# Altium PCB HU_SUPPORT_BOARD.PcbDoc (part 1 of 2)
Units mm, origin at the board's own origin, x right, y up, seen from the top; angles counter-clockwise.
Board outline 160 x 100 mm, 4 copper layers (Top Layer, Layer 1, Layer 2, Bottom Layer), stack 1.586 mm thick; 158 components, 113 nets, 591 pads, 28 vias.
Unrouted connection lines stored in the file: 303.
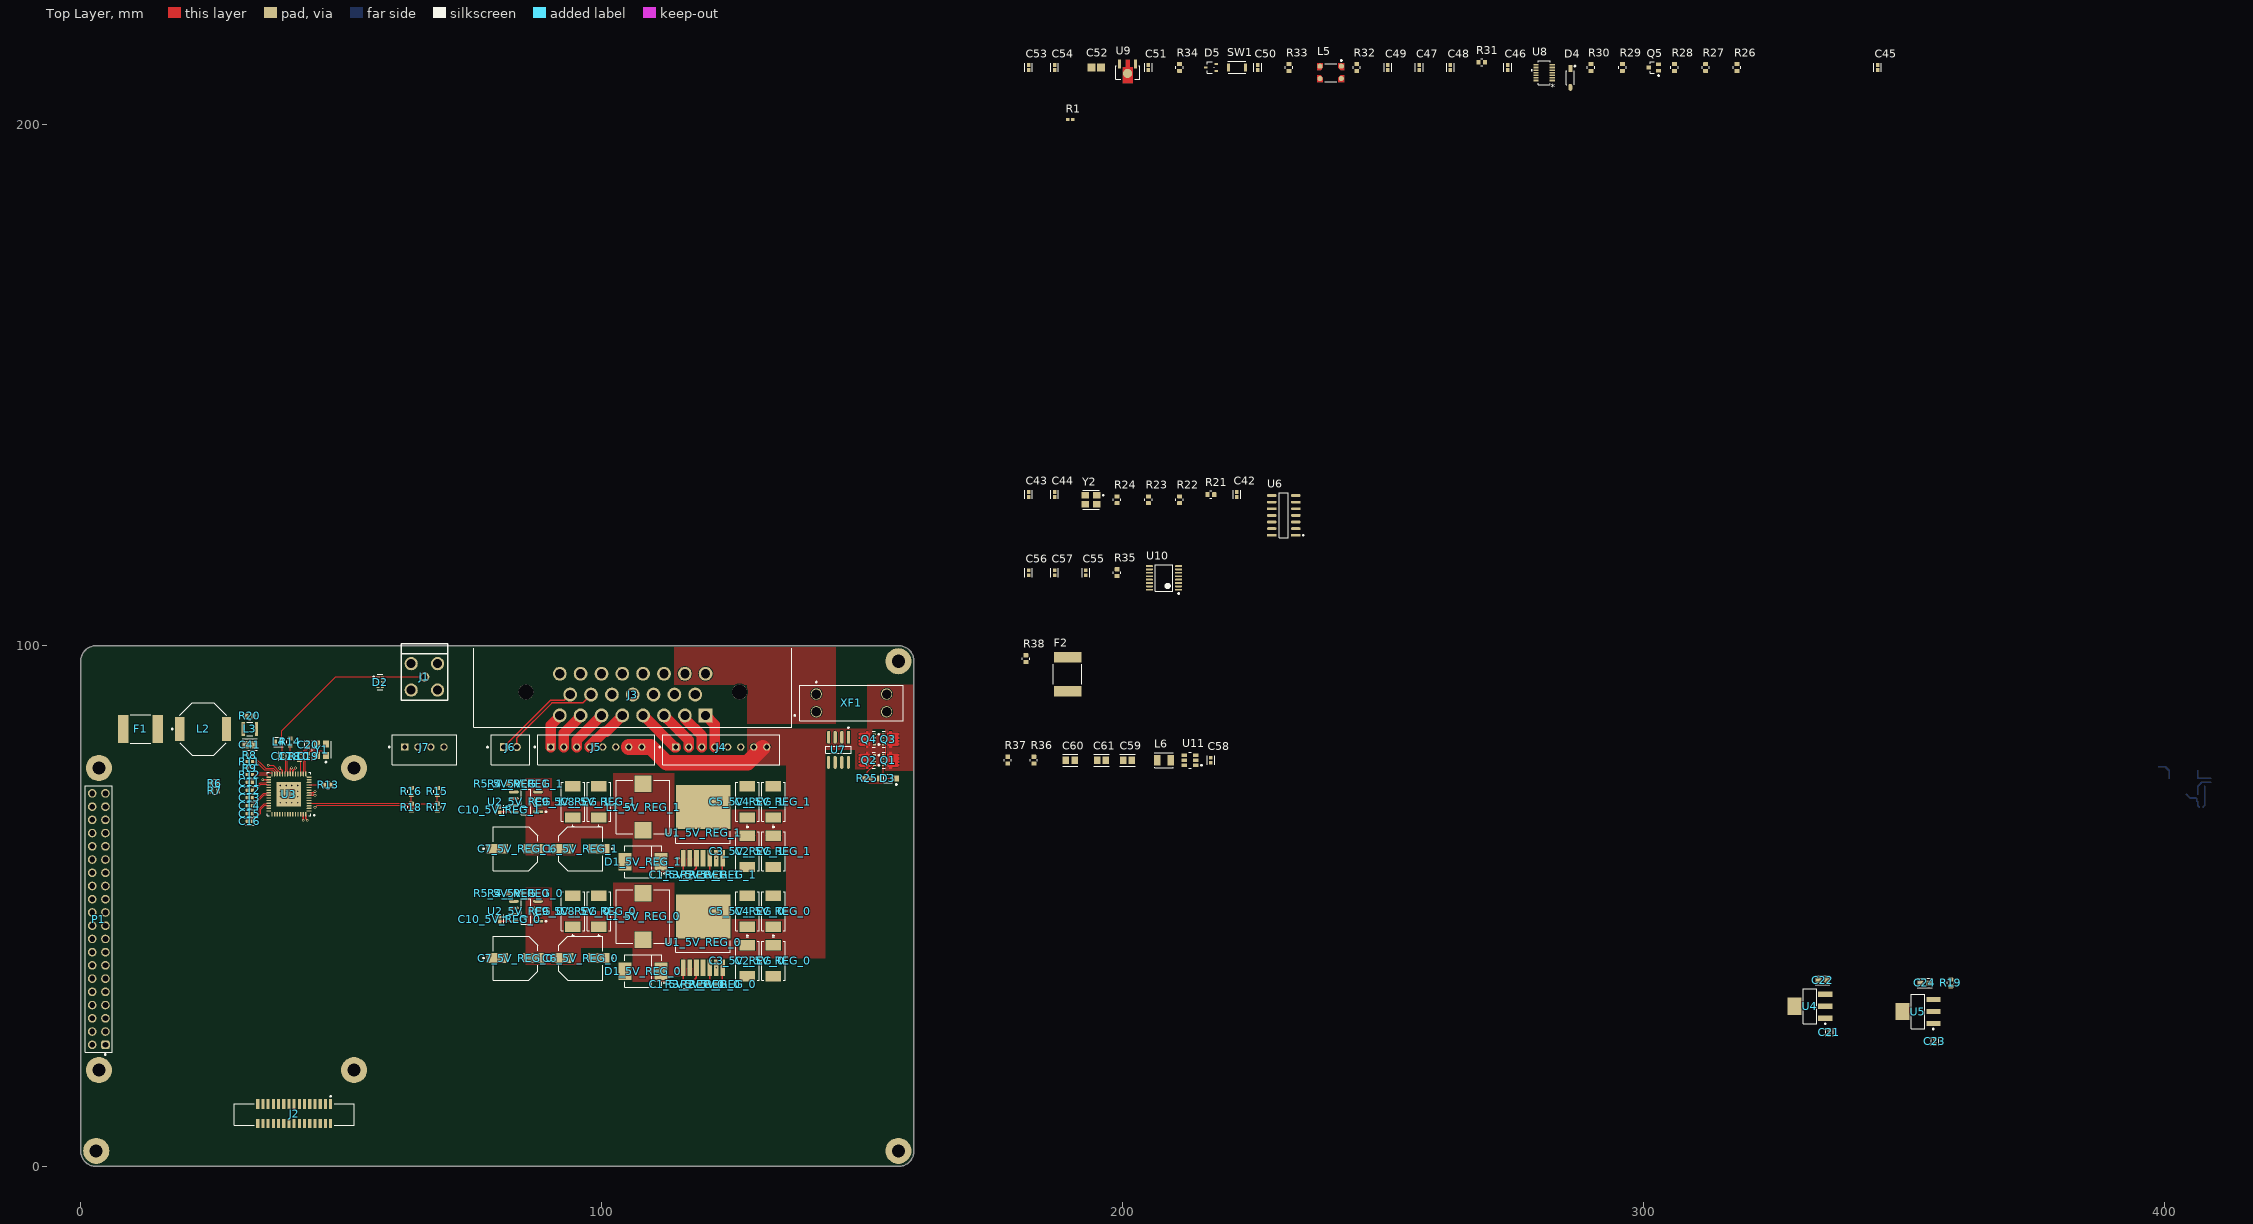
[diagram p0: Top Layer view]
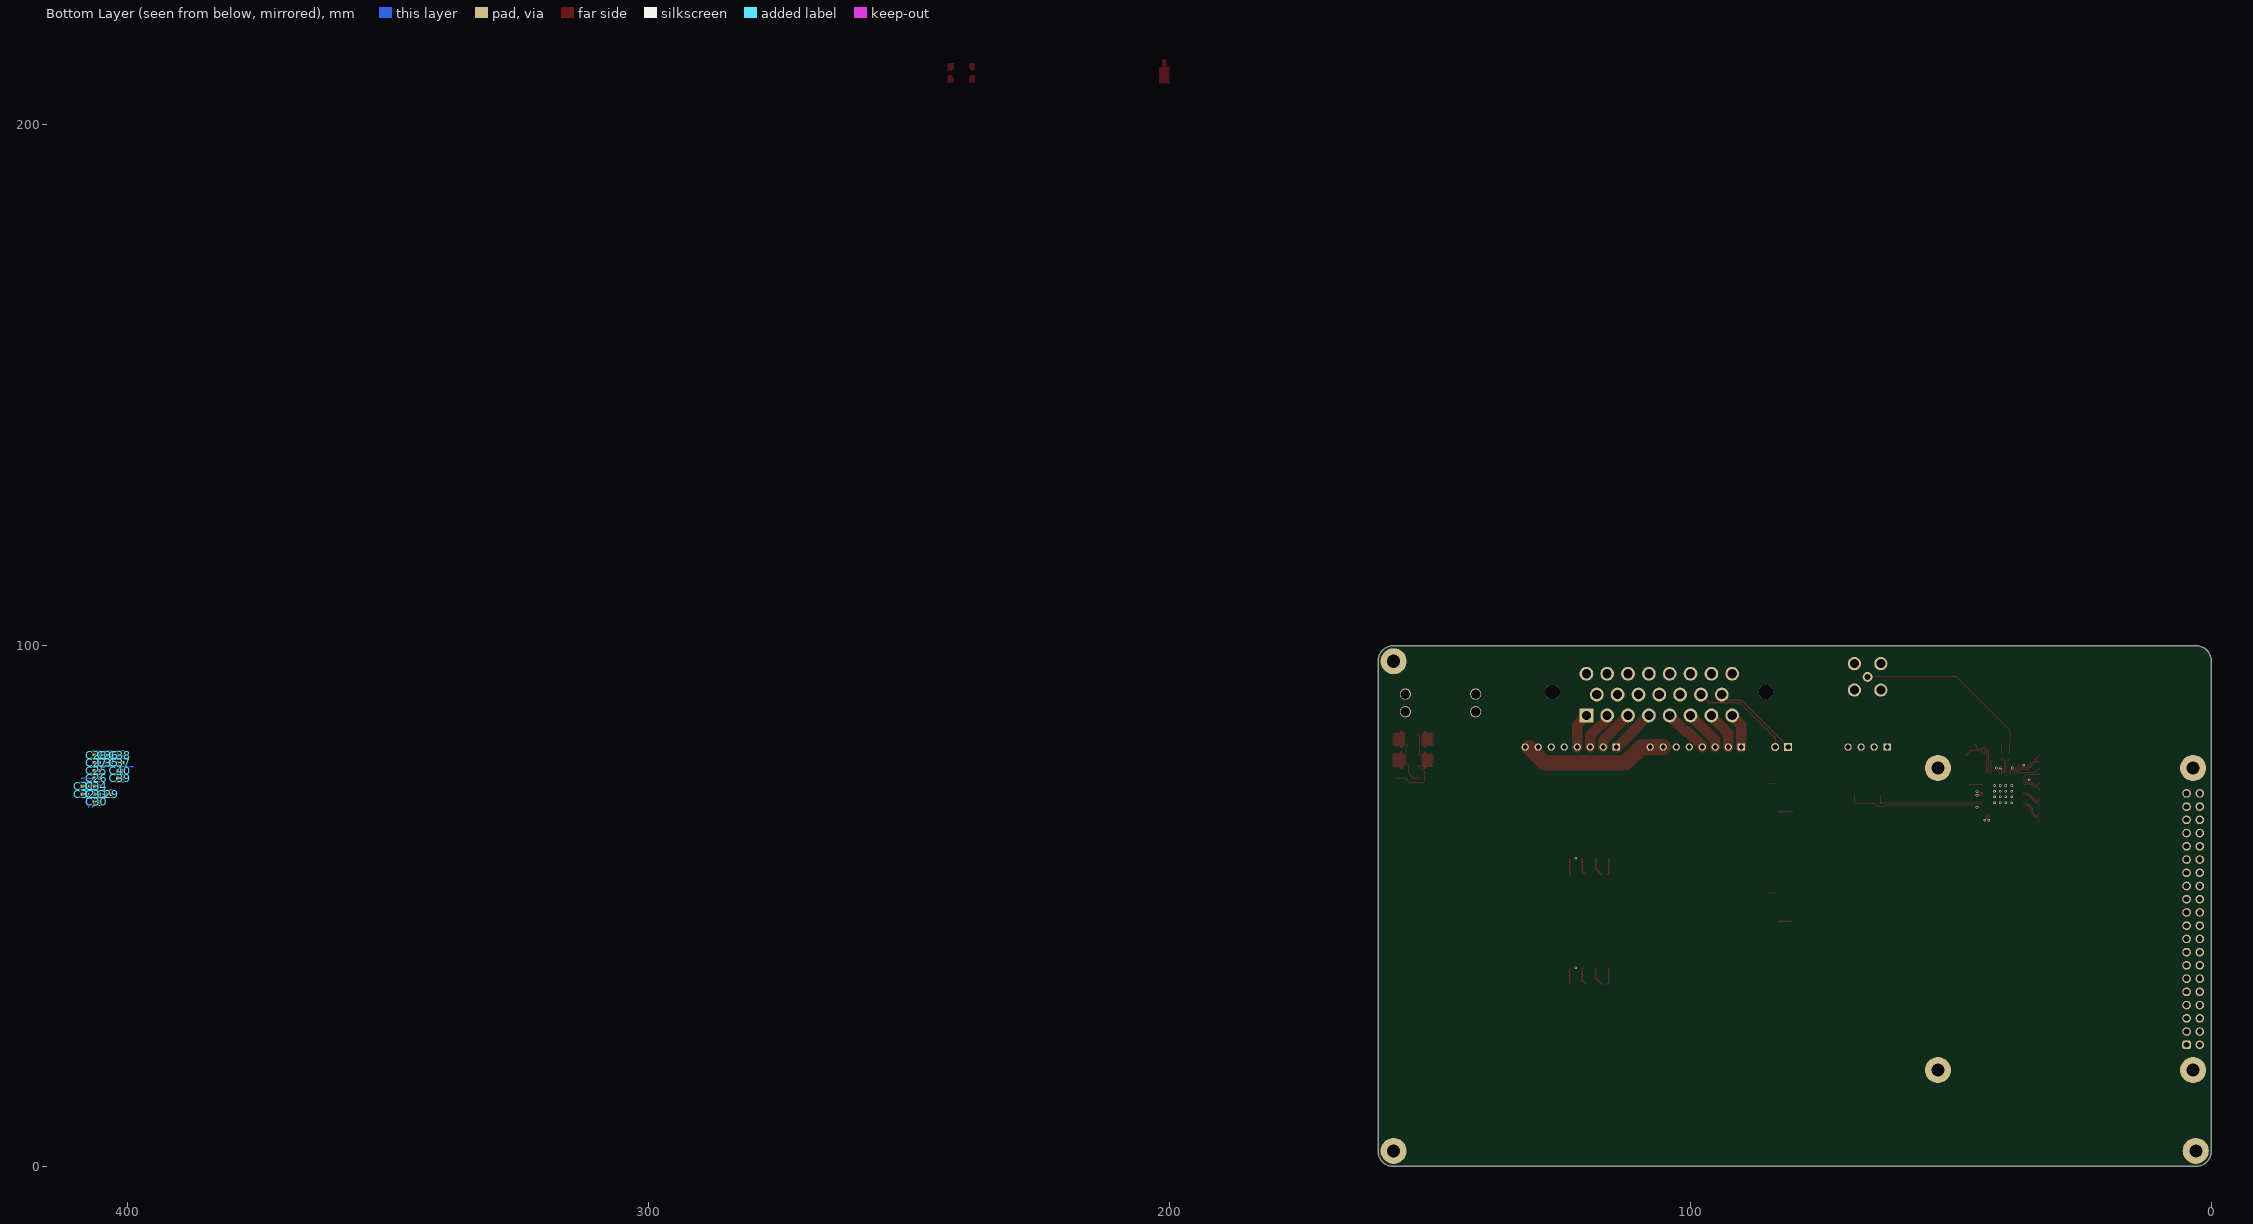
[diagram p1: Bottom Layer view, seen from below]

## Layer stack, top to bottom
Top Solder: solder mask 0.0102, Solder Resist, Dk 3.5
Top Layer: signal copper 0.035
Dielectric 2: prepreg 0.2104, PP-006, Dk 4.1
Layer 1: signal copper 0.0152
Dielectric 1: dielectric 1.065, FR-4, Dk 4.8
Layer 2: signal copper 0.0152
Dielectric 3: prepreg 0.2104, PP-006, Dk 4.1
Bottom Layer: signal copper 0.035
Bottom Solder: solder mask 0.0102, Solder Resist, Dk 3.5

## Board outline
0,3 0,97 cw(c3,97) 3,100 157,100 cw(c157,97) 160,97 160,3 cw(c157,3) 157,0 3,0 cw(c3,3)

## Design rules (kind name [scope] priority, off if disabled: settings)
BoardOutlineClearance [All] p1: gap=0.2 ignorepadtopadclearanceinfootprint=FALSE
Clearance [All] p1: gap=0.102 ignorepadtopadclearanceinfootprint=FALSE except(0.127: Arc-Via Track-Via SMDPad-Via THPad-Via Via-Via Via-Fill Via-Poly Via-Region Via-Text; 0.25: Arc-Hole Track-Hole SMDPad-Hole THPad-Hole Via-Hole Fill-Hole Poly-Hole Region-Hole Text-Hole)
ComponentClearance [All] p1: gap=0.102 collisioncheckmode=3 verticalgap=0.102 showdistances=TRUE
DiffPairsRouting [All] p1: maxlimit=0.102 minlimit=0.102 mostfreqgap=0.102 toplayer_minwidth=0.102 toplayer_maxwidth=1816.048 toplayer_prefwidth=0.102 midlayer1_minwidth=0.102 midlayer1_maxwidth=1816.048 midlayer1_prefwidth=0.102 midlayer2_minwidth=0.102 midlayer2_maxwidth=1816.048 midlayer2_prefwidth=0.102 bottomlayer_minwidth=0.102 bottomlayer_maxwidth=1816.048 bottomlayer_prefwidth=0.102 maxuncoupledlength=12.7
Height [All] p1: minheight=0 maxheight=1816.048 prefheight=12.7
HoleSize [All] p1: absolutevalues=TRUE maxlimit=6.3 minlimit=0.2 maxpercent=80.000 minpercent=20.000
HoleToHoleClearance [All] p1: gap=0.25 allowstackedmicrovias=FALSE
MinimumAnnularRing [All] p1: minimumring=0.076
MinimumSolderMaskSliver [All] p1: minsoldermaskwidth=0
PlaneClearance [All] p1: clearance=0.102
PlaneConnect PlaneConnectPowerPads [InPadClass('PowerPads')] p1: planeconnectstyle=Direct reliefexpansion=0.508 reliefentries=4 reliefconductorwidth=0.254 reliefairgap=0.254
PlaneConnect [All] p2: pad.planeconnectstyle=Relief pad.reliefexpansion=0.3 pad.reliefentries=4 pad.reliefconductorwidth=0.102 pad.reliefairgap=0.102 via.planeconnectstyle=Direct via.reliefexpansion=0.3 via.reliefentries=4 via.reliefconductorwidth=0.127 via.reliefairgap=0.127
PolygonConnect PolygonConnectPowerPads [All vs (InPadClass('PowerPads'))] p1: connectstyle=Direct reliefconductorwidth=0.254 reliefentries=4 polygonreliefangle="90 Angle" airgapwidth=0.254
PolygonConnect [All] p2: thpad.connectstyle=Relief thpad.reliefconductorwidth=0.102 thpad.reliefentries=4 thpad.polygonreliefangle="90 Angle" thpad.airgapwidth=0.102 smdpad.connectstyle=Relief smdpad.reliefconductorwidth=0.102 smdpad.reliefentries=4 smdpad.polygonreliefangle="90 Angle" smdpad.airgapwidth=0.102 via.connectstyle=Direct via.reliefconductorwidth=0.127 via.reliefentries=4 via.polygonreliefangle="90 Angle" via.airgapwidth=0.127
RoomDefinition 5V_REG_1 [InComponentClass('5V_REG_1')] p1: confinementstyle=ConfineIn formatcopy=TRUE lockcomponents=FALSE outline 136,75.5 77,75.5 77,55 136,55
RoomDefinition 5V_REG_0 [InComponentClass('5V_REG_0')] p2: confinementstyle=ConfineIn formatcopy=TRUE lockcomponents=FALSE outline 136,54.5 77,54.5 77,34 136,34
RoutingVias [All] p1: holewidth=0.2 width=0.45 viastyle="Through Hole" minholewidth=0.2 minwidth=0.45 maxholewidth=6.3 maxwidth=6.55
SilkToSilkClearance [All] p1: silktosilkclearance=0
SilkToSolderMaskClearance [IsPad] p1: minsilkscreentomaskgap=0.102 clearancetoexposedcopper=TRUE
SolderMaskExpansion [All] p1: expansion=0.075 istentingtop=FALSE
Width [All] p1: maxlimit=1816.048 minlimit=0.102 preferedwidth=0.102
20 further rules are at their usual default settings.

## Classes and differential pairs
differential pair class CAN: CAN PRE_CAN
differential pair class CSI0: CKA CKC DA0 DA1
differential pair class CSI0_PRE: CSI_CLK CSI_D0 CSI_D1
differential pair class 100DIFF: SIOA
channel class 5V_REG: 5V_REG_0 5V_REG_1
net class PWR: NetC41_1 NetF1_2 NetL3_2 PoC_PWR
net class 50SINGLE: PoC_A
component class PWR_MGMT: C45 C46 C47 C48 C49 C50 C51 C52 C53 C54 D3 D4 D5 L5 Q1 Q2 Q3 Q4 Q5 R25 R26 R27 R28 R29 R30 R31 R32 R33 R34 SW1 U7 U8 U9 XF1
component class HU_SUPPORT_BOARD: F2 J1 J2 J3 J4 J5 J6 J7 P1 R1 R38
component class GMSL_DESERIALIZER_0: C11 C12 C13 C14 C15 C16 C17 C18 C19 C20 C21 C22 C23 C24 C25 C26 C27 C28 C29 C30 C31 C32 C33 C34 C35 C36 C37 C38 C39 C40 C41 D2 F1 L2 L3 L4 R6 R7 R8 R9 R10 R11 R12 R13 R14 R15 R16 R17 R18 R19 R20 U3 U4 U5 Y1
component class CAN_CTRLR_0: C42 C43 C44 R21 R22 R23 R24 U6 Y2
component class ADC_0: C55 C56 C57 R35 U10
component class 5V_REG_1: C1_5V_REG_1 C2_5V_REG_1 C3_5V_REG_1 C4_5V_REG_1 C5_5V_REG_1 C6_5V_REG_1 C7_5V_REG_1 C8_5V_REG_1 C9_5V_REG_1 C10_5V_REG_1 D1_5V_REG_1 L1_5V_REG_1 R2_5V_REG_1 R3_5V_REG_1 R4_5V_REG_1 R5_5V_REG_1 U1_5V_REG_1 U2_5V_REG_1
component class 5V_REG_0: C1_5V_REG_0 C2_5V_REG_0 C3_5V_REG_0 C4_5V_REG_0 C5_5V_REG_0 C6_5V_REG_0 C7_5V_REG_0 C8_5V_REG_0 C9_5V_REG_0 C10_5V_REG_0 D1_5V_REG_0 L1_5V_REG_0 R2_5V_REG_0 R3_5V_REG_0 R4_5V_REG_0 R5_5V_REG_0 U1_5V_REG_0 U2_5V_REG_0
component class 3V3_REG_0: C58 C59 C60 C61 L6 R36 R37 U11
differential pair USB_D: +USB_D_P -USB_D_N
differential pair CAN: +CAN_P -CAN_N
differential pair X25: +X25_P -X25_N
differential pair X20: +X20_P -X20_N
differential pair SIOA: +SIOA_P -SIOA_N
differential pair PRE_CAN: +PRE_CAN_P -PRE_CAN_N
differential pair DA1: +DA1_P -DA1_N
differential pair DA0: +DA0_P -DA0_N
differential pair CSI_D1: +CSI_D1_P -CSI_D1_N
differential pair CSI_D0: +CSI_D0_P -CSI_D0_N
differential pair CSI_CLK: +CSI_CLK_P -CSI_CLK_N
differential pair CKA: +CKA_P -CKA_N

## Components (designator, comment, footprint, x,y, rotation, side; value= is the part's Value field where it differs from the comment)
C1_5V_REG_0 "10n" FP-0402-L_1_0_0_05-W_0_5-IPC_A 116.5,35 r180 top (schematic designator C1)
C1_5V_REG_1 "10n" FP-0402-L_1_0_0_05-W_0_5-IPC_A 116.5,56 r180 top (schematic designator C1)
C2_5V_REG_0 "TPSE686K025R0125" FP-TPSE-MFG 133,39.5 r90 top (schematic designator C2)
C2_5V_REG_1 "TPSE686K025R0125" FP-TPSE-MFG 133,60.5 r90 top (schematic designator C2)
C3_5V_REG_0 "TPSE686K025R0125" FP-TPSE-MFG 128,39.5 r90 top (schematic designator C3)
C3_5V_REG_1 "TPSE686K025R0125" FP-TPSE-MFG 128,60.5 r90 top (schematic designator C3)
C4_5V_REG_0 "TPSE686K025R0125" FP-TPSE-MFG 133,49 r270 top (schematic designator C4)
C4_5V_REG_1 "TPSE686K025R0125" FP-TPSE-MFG 133,70 r270 top (schematic designator C4)
C5_5V_REG_0 "TPSE686K025R0125" FP-TPSE-MFG 128,49 r270 top (schematic designator C5)
C5_5V_REG_1 "TPSE686K025R0125" FP-TPSE-MFG 128,70 r270 top (schematic designator C5)
C6_5V_REG_0 "25SVPF180M" FP-OS-CON-SMT-E12-MFG 96,40 r180 top (schematic designator C6)
C6_5V_REG_1 "25SVPF180M" FP-OS-CON-SMT-E12-MFG 96,61 r180 top (schematic designator C6)
C7_5V_REG_0 "25SVPF180M" FP-OS-CON-SMT-E12-MFG 83.5,40 r0 top (schematic designator C7)
C7_5V_REG_1 "25SVPF180M" FP-OS-CON-SMT-E12-MFG 83.5,61 r0 top (schematic designator C7)
C8_5V_REG_0 "TPSE686K025R0125" FP-TPSE-MFG 99.5,49 r270 top (schematic designator C8)
C8_5V_REG_1 "TPSE686K025R0125" FP-TPSE-MFG 99.5,70 r270 top (schematic designator C8)
C9_5V_REG_0 "TPSE686K025R0125" FP-TPSE-MFG 94.5,49 r270 top (schematic designator C9)
C9_5V_REG_1 "TPSE686K025R0125" FP-TPSE-MFG 94.5,70 r270 top (schematic designator C9)
C10_5V_REG_0 "100n" FP-0402-L_1_0_0_05-W_0_5-IPC_A 80.5,47.5 r270 top (schematic designator C10)
C10_5V_REG_1 "100n" FP-0402-L_1_0_0_05-W_0_5-IPC_A 80.5,68.5 r270 top (schematic designator C10)
C11 "100n" FP-0402-L_1_0_0_05-W_0_5-IPC_A 32.5,73.75 r180 top
C12 "100n" FP-0402-L_1_0_0_05-W_0_5-IPC_A 32.5,72.25 r180 top
C13 "100n" FP-0402-L_1_0_0_05-W_0_5-IPC_A 32.5,70.75 r180 top
C14 "100n" FP-0402-L_1_0_0_05-W_0_5-IPC_A 32.5,69.25 r180 top
C15 "100n" FP-0402-L_1_0_0_05-W_0_5-IPC_A 32.5,67.75 r180 top
C16 "100n" FP-0402-L_1_0_0_05-W_0_5-IPC_A 32.5,66.25 r180 top
C17 "100n" FP-0402-L_1_0_0_05-W_0_5-IPC_A 38.75,78.75 r90 top value=220n
C18 "100n" FP-0402-L_1_0_0_05-W_0_5-IPC_A 40.25,78.75 r90 top value=220n
C19 "30p" FP-0402-L_1_0_0_05-W_0_5-IPC_A 43.75,78.75 r90 top
C20 "30p" FP-0402-L_1_0_0_05-W_0_5-IPC_A 43.75,81 r270 top
C21 "100n" FP-0402-L_1_0_0_05-W_0_5-IPC_A 335.75,25.729 r270 top
C22 "GRM188R60J106ME47D" FP-GRM188-0_1-e0_2_0_55-IPC_A 334.448,35.75 r180 top
C23 "100n" FP-0402-L_1_0_0_05-W_0_5-IPC_A 356,24 r270 top
C24 "GRM188R60J106ME47D" FP-GRM188-0_1-e0_2_0_55-IPC_A 354.052,35.244 r180 top
C25 "10u" FP-0402-L_1_0_0_05-W_0_5-IPC_A 406,76 r0 bottom
C26 "100n" FP-0402-L_1_0_0_05-W_0_5-IPC_A 406,74.5 r0 bottom
C27 "10u" FP-0402-L_1_0_0_05-W_0_5-IPC_A 406,77.5 r180 bottom
C28 "100n" FP-0402-L_1_0_0_05-W_0_5-IPC_A 406,79 r180 bottom
C29 "10u" FP-0402-L_1_0_0_05-W_0_5-IPC_A 403.75,71.5 r0 bottom
C30 "100n" FP-0402-L_1_0_0_05-W_0_5-IPC_A 406,70 r0 bottom
C31 "10u" FP-0402-L_1_0_0_05-W_0_5-IPC_A 408.25,73 r180 bottom
C32 "100n" FP-0402-L_1_0_0_05-W_0_5-IPC_A 408.25,71.5 r180 bottom
C33 "10u" FP-0402-L_1_0_0_05-W_0_5-IPC_A 406,71.5 r0 bottom
C34 "10n" FP-0402-L_1_0_0_05-W_0_5-IPC_A 406,73 r0 bottom
C35 "10u" FP-0402-L_1_0_0_05-W_0_5-IPC_A 403.75,77.5 r0 bottom
C36 "10n" FP-0402-L_1_0_0_05-W_0_5-IPC_A 403.75,79 r0 bottom
C37 "10u" FP-0402-L_1_0_0_05-W_0_5-IPC_A 401.5,77.5 r0 bottom
C38 "10n" FP-0402-L_1_0_0_05-W_0_5-IPC_A 401.5,79 r0 bottom
C39 "10u" FP-0402-L_1_0_0_05-W_0_5-IPC_A 401.5,74.5 r180 bottom
C40 "10n" FP-0402-L_1_0_0_05-W_0_5-IPC_A 401.5,76 r180 bottom
C41 "GRM21BR61E226ME44L" FP-GRM21B-0_2-e0_2_0_7-IPC_B 32.5,81 r0 top
C42 "100n" FP-0402-L_1_0_0_05-W_0_5-IPC_A 222,129 r270 top
C43 "30p" FP-0402-L_1_0_0_05-W_0_5-IPC_A 182,129 r270 top
C44 "30p" FP-0402-L_1_0_0_05-W_0_5-IPC_A 187,129 r270 top
C45 "100n" FP-0402-L_1_0_0_05-W_0_5-IPC_A 345,211 r270 top
C46 "100n" FP-0402-L_1_0_0_05-W_0_5-IPC_A 274,211 r270 top
C47 "100n" FP-0402-L_1_0_0_05-W_0_5-IPC_A 257,211 r270 top
C48 "100n" FP-0402-L_1_0_0_05-W_0_5-IPC_A 263,211 r270 top
C49 "6.6p" FP-0402-L_1_0_0_05-W_0_5-IPC_A 251,211 r270 top
C50 "100n" FP-0402-L_1_0_0_05-W_0_5-IPC_A 226,211 r270 top
C51 "6.6p" FP-0402-L_1_0_0_05-W_0_5-IPC_A 205,211 r270 top
C52 "C0805C225K9PACTU" CAPC2013X145X50ML20T25 195,211 r180 top
C53 "100n" FP-0402-L_1_0_0_05-W_0_5-IPC_A 182,211 r270 top
C54 "100n" FP-0402-L_1_0_0_05-W_0_5-IPC_A 187,211 r270 top
C55 "100n" FP-0402-L_1_0_0_05-W_0_5-IPC_A 193,114 r270 top
C56 "100n" FP-0402-L_1_0_0_05-W_0_5-IPC_A 182,114 r270 top
C57 "100n" FP-0402-L_1_0_0_05-W_0_5-IPC_A 187,114 r270 top
C58 "100n" FP-0402-L_1_0_0_05-W_0_5-IPC_A 217,78 r270 top
C59 "GRM21BR61E226ME44L" FP-GRM21B-0_2-e0_2_0_7-IPC_B 201,78 r180 top
C60 "GRM21BR61E226ME44L" FP-GRM21B-0_2-e0_2_0_7-IPC_B 190,78 r180 top
C61 "GRM21BR61E226ME44L" FP-GRM21B-0_2-e0_2_0_7-IPC_B 196,78 r180 top
D1_5V_REG_0 "B540C-13-F" FP-SMC-MFG 108,37.5 r180 top value=300pF (schematic designator D1)
D1_5V_REG_1 "B540C-13-F" FP-SMC-MFG 108,58.5 r180 top value=300pF (schematic designator D1)
D2 "ESD204DQAR" FP-DQA0010A-MFG 57.5,93 r0 top value=0.55pF
D3 "MMSZ5242BT1G" ONSC-SOD-123-2-425-04_V 155,74.5 r180 top
D4 "1N4148W-TP" FP-SOD-123-IPC_A 286,209 r270 top
D5 "ESDCAN02-2BWY" FP-SOT323-3L-MFG 217,211 r180 top value=3pF
F1 "2920L050DR" FP-2920L050DR-MFG 11.5,84 r0 top
F2 "2920L050DR" FP-2920L050DR-MFG 189.5,94.5 r270 top
J1 "FA1-NDRP-PCB-8" FA1-NDRP-PCB-8-Footprint-1 66,94 r0 top
J2 "1-1734248-5" FP-1-1734248-5-MFG 41,10 r0 top locked
J3 "776087-1" FP-776087-1-MFG 106,103.5 r180 top locked
J4 "B8B-XH-A(LF)(SN)" FP-B8B-XH-A_LF_SN-MFG 123,80 r180 top
J5 "B8B-XH-A(LF)(SN)" FP-B8B-XH-A_LF_SN-MFG 99,80 r180 top
J6 "B2B-XH-A(LF)(SN)" FP-B2B-XH-A_LF_SN-MFG 82.5,80 r0 top
J7 "B4B-XH-A(LF)(SN)" FP-B4B-XH-A_LF_SN-MFG 66,80 r180 top
L1_5V_REG_0 "IHLP4040DZER220M11" FP-IHLP-4040DZ-FP_3_124x3-MFG 108,48 r90 top (schematic designator L1)
L1_5V_REG_1 "IHLP4040DZER220M11" FP-IHLP-4040DZ-FP_3_124x3-MFG 108,69 r90 top (schematic designator L1)
L2 "744066101" WE-TPC_1038 23.5,84 r90 top
L3 "ADL32VHC-220M" FP-1210POC-MFG 32.5,84 r0 top value=22uH
L4 "PFL1609-561MEW" FP-PFL1609-MFG 38,81.5 r0 top value=0.56uH
L5 "SRF4532-510Y" FP-SRF4532-MFG 240,210 r180 top
L6 "LQH32PN4R7NN0L" FP-LQH32PB_N0-MFG 208,78 r180 top
P1 "61304021121" 61304021121 3.5,47.5 r90 top locked
Q1 "SISH615ADN-T1-GE3" SISH615ADN-T1-GE3-Footprint-1 155.49,78.037 r270 top
Q2 "SISH615ADN-T1-GE3" SISH615ADN-T1-GE3-Footprint-1 151.01,77.962 r90 top
Q3 "SISH615ADN-T1-GE3" SISH615ADN-T1-GE3-Footprint-1 155.49,82.038 r270 top
Q4 "SISH615ADN-T1-GE3" SISH615ADN-T1-GE3-Footprint-1 151.01,81.963 r90 top
Q5 "BSS138W-7-F" DIOD-SOT323-3_V 302,211 r180 top
R1 "DNP" RESC1005X40X25ML05T05 190,201 r180 top
R2_5V_REG_0 "1k" R0603B 122.5,35 r180 top (schematic designator R2)
R2_5V_REG_1 "1k" R0603B 122.5,56 r180 top (schematic designator R2)
R3_5V_REG_0 "DNP" R0603B 119.5,35 r180 top value=1k (schematic designator R3)
R3_5V_REG_1 "DNP" R0603B 119.5,56 r180 top value=1k (schematic designator R3)
R4_5V_REG_0 "100k" R0603B 85.5,52.5 r0 top (schematic designator R4)
R4_5V_REG_1 "100k" R0603B 85.5,73.5 r0 top (schematic designator R4)
R5_5V_REG_0 "100k" R0603B 82.75,52.5 r0 top value=24k (schematic designator R5)
R5_5V_REG_1 "100k" R0603B 82.75,73.5 r0 top value=24k (schematic designator R5)
R6 "10k" R0603B 25.75,73.625 r180 top
R7 "10k" R0603B 25.75,72.125 r180 top
R8 "0402 JUMPER" RESC1005X40X25ML05T05 32.5,79 r0 top
R9 "0402 JUMPER" RESC1005X40X25ML05T05 32.5,76.5 r0 top
R10 "402" R0603B 42,78.75 r270 top
R11 "0402 JUMPER" RESC1005X40X25ML05T05 32.5,77.75 r0 top
R12 "0402 JUMPER" RESC1005X40X25ML05T05 32.5,75.25 r0 top
R13 "100k" R0603B 47.5,73.25 r0 top
R14 "49.9" R0603B 40.25,81.5 r270 top
R15 "80.6k" R0603B 68.5,72 r90 top
R16 "DNP" R0603B 63.5,72 r90 top
R17 "20.5k" R0603B 68.5,69 r90 top
R18 "10k" R0603B 63.5,69 r90 top
R19 "120" R0603B 359.052,35.244 r270 top
R20 "5.1k" R0603B 32.5,86.5 r180 top
R21 "100k" R0603B 217,129 r180 top value=330
R22 "100k" R0603B 211,128 r270 top value=330
R23 "100k" R0603B 205,128 r270 top value=330
R24 "DNP" R0603B 199,128 r270 top value=330
R25 "100k" R0603B 151,74.5 r0 top
R26 "100k" R0603B 318,211 r270 top
R27 "100k" R0603B 312,211 r270 top
R28 "1k" R0603B 306,211 r270 top
R29 "24k" R0603B 296,211 r270 top
R30 "100k" R0603B 290,211 r270 top
R31 "100k" R0603B 269,212 r180 top
R32 "1k" R0603B 245,211 r270 top
R33 "60.4" R0603B 232,211 r270 top
R34 "60.4" R0603B 211,211 r270 top
R35 "56" R0603B 199,114 r270 top
R36 "24k" R0603B 183,78 r270 top
R37 "100k" R0603B 178,78 r270 top
R38 "DNP" R0603B 181.5,97.5 r270 top
SW1 "KXT331LHS" FP-KXT331LHS-MFG 222,211 r180 top
U1_5V_REG_0 "LM2678S-5.0/NOPB" KTW0007B_L 119.5,44.4 r90 top (schematic designator U1)
U1_5V_REG_1 "LM2678S-5.0/NOPB" KTW0007B_L 119.5,65.4 r90 top (schematic designator U1)
U2_5V_REG_0 "ACS711KLCTR-12AB-T" FP-LC-8-IPC_C 85.5,49 r180 top (schematic designator U2)
U2_5V_REG_1 "ACS711KLCTR-12AB-T" FP-LC-8-IPC_C 85.5,70 r180 top (schematic designator U2)
U3 "MAX96724FGTN/V+" MAX96724FGTN_V+-Footprint-1 40,71.5 r180 top
U4 "LD1117S18TR" SOT-223_M 332,30.75 r180 top
U5 "LD1117S12TR" SOT-223_M 352.75,29.75 r180 top
U6 "MCP2518FDT-E/SL" FP-C04-065-SL-IPC_C 231,125 r180 top
U7 "ACS711KLCTR-25AB-T" FP-LC-8-IPC_A 145.5,80 r270 top
U8 "TCAN1146DYYRQ1" TCAN1146DYYRQ1-Footprint-1 281,210 r180 top
U9 "AP7381-50Y-13" FP-SOT89-MFG 201,210 r180 top
U10 "ADC088S022CIMT/NOPB" MTC16_L 208,113 r180 top
U11 "AP63203WU-7" FP-TSOT26-MFG 213,78 r180 top
XF1 "3557-2" KSTN-3557-2 148,89 r0 top
Y1 "ABM8G-25.000MHZ-18-D2Y-T" FP-ABM8G-MFG 46.25,80 r90 top
Y2 "ABM8G-20.000MHZ-18-D2Y-T" FP-ABM8G-MFG 194,128 r180 top

## Footprints (in the part's own frame and the unit in brackets; to place one, negate y for a bottom-side part, rotate by r counter-clockwise, add the part's x,y. Pads: shape width x height; smd on the part's side, far side on the other; paste and mask are expansions set on the pad)
61304021121 [mm] "Pin Header, pitch 2.54 mm, THT, Vertical, dual row, 40p"
  rrect50% 1.65x1.65 hole 1.1: 1(-24.13,-1.27)
  round 1.65 hole 1.1: 2(-24.13,1.27) 3(-21.59,-1.27) 4(-21.59,1.27) 5(-19.05,-1.27) 6(-19.05,1.27) 7(-16.51,-1.27) 8(-16.51,1.27) 9(-13.97,-1.27) 10(-13.97,1.27) 11(-11.43,-1.27) 12(-11.43,1.27) 13(-8.89,-1.27) 14(-8.89,1.27) 15(-6.35,-1.27) 16(-6.35,1.27) 17(-3.81,-1.27) 18(-3.81,1.27) 19(-1.27,-1.27) 20(-1.27,1.27) 21(1.27,-1.27) 22(1.27,1.27) 23(3.81,-1.27) 24(3.81,1.27) 25(6.35,-1.27) 26(6.35,1.27) 27(8.89,-1.27) 28(8.89,1.27) 29(11.43,-1.27) 30(11.43,1.27) 31(13.97,-1.27) 32(13.97,1.27) 33(16.51,-1.27) 34(16.51,1.27) 35(19.05,-1.27) 36(19.05,1.27) 37(21.59,-1.27) 38(21.59,1.27) 39(24.13,-1.27) 40(24.13,1.27)
  silkscreen extent -26.13,-2.62 25.55,2.62, body extent -25.4,-2.54 25.4,2.54, height 8.59
CAPC2013X145X50ML20T25 [mm] "Chip Capacitor, 2-Leads, Body 2.00x1.25mm, IPC Low Density"
  rect 1.5x1.55 smd: 1(-0.9,0) 2(0.9,0)
  body extent -1.1,-0.72 1.1,0.72, height 1.45
DIOD-SOT323-3_V [mm] "SOT323, 3-Leads, Body 2.2x1.35mm, Pitch 0.65mm"
  rect 0.9x0.7 smd: 1(-0.95,0.65) 2(-0.95,-0.65) 3(0.95,0)
  silkscreen extent -1.08,-1.1 0.67,1.67, body extent -1.1,-1.1 1.1,1.1, height 1.07
FA1-NDRP-PCB-8-Footprint-1 [mil]
  round 75 hole 46: 1(0,0)
  round 100 hole 67: 2(-100,-100) 2(-100,100) 2(100,-100) 2(100,100)
  silkscreen extent -175,-175 175,250, body extent -157,-183 157,758, height 421
FP-1-1734248-5-MFG [mm]
  rect 0.6x1.65 smd paste+0 mask+0: 1(7,-1.75) 2(6,-1.75) 3(5,-1.75) 4(4,-1.75) 5(3,-1.75) 6(2,-1.75) 7(1,-1.75) 8(0,-1.75) 9(-1,-1.75) 10(-2,-1.75) 11(-3,-1.75) 12(-4,-1.75) 13(-5,-1.75) 14(-6,-1.75) 15(-7,-1.75)
  rect 0.6x1.85 smd paste+0 mask+0: 1(7,2) 2(6,2) 3(5,2) 4(4,2) 5(3,2) 6(2,2) 7(1,2) 8(0,2) 9(-1,2) 10(-2,2) 11(-3,2) 12(-4,2) 13(-5,2) 14(-6,2) 15(-7,2)
  silkscreen extent -11.55,-2.07 11.55,3.6, body extent -11.65,-2.67 11.65,3.02, height 0.25
FP-0402-L_1_0_0_05-W_0_5-IPC_A [mm]
  rect 0.715x0.672 smd paste+0 mask+0: 1(-0.479,0) 2(0.479,0)
  silkscreen extent -0.84,-0.74 0.84,0.74, body extent -1.04,-0.54 1.04,0.54, height 0.25
FP-1210POC-MFG [mm]
  rect 0.65x2.65 smd paste+0 mask+0: 1(-1.27,0) 2(1.27,0)
  silkscreen extent -0.57,-1.34 0.57,1.34, body extent -1.75,-1.44 1.75,1.44, height 0.25
FP-2920L050DR-MFG [mm]
  rect 2x5.3 smd paste+0 mask+0: 1(-3.3,0) 2(3.3,0)
  silkscreen extent -1.92,-2.72 1.92,2.72, body extent -4.4,-2.82 4.4,2.82, height 0.25
FP-776087-1-MFG [mm]
  rect 2.65x2.65 hole 1.75 paste-2539.97 mask+0: 1(-14,16.9)
  round 2.65 hole 1.75 paste-2539.97 mask+0: 2(-10,16.9) 3(-6,16.9) 4(-2,16.9) 5(2,16.9) 6(6,16.9) 7(10,16.9) 8(14,16.9) 9(-12,12.9) 10(-8,12.9) 11(-4,12.9) 12(0,12.9) 13(4,12.9) 14(8,12.9) 15(12,12.9) 16(-14,8.9) 17(-10,8.9) 18(-6,8.9) 19(-2,8.9) 20(2,8.9) 21(6,8.9) 22(10,8.9) 23(14,8.9)
  round 2.85 hole 2.85 unplated paste-2539.97 mask+0: ""(-20.5,12.4) ""(20.5,12.4)
  silkscreen extent -31.22,4 30.5,19.15, body extent -30.6,-19.25 30.6,19.25, height 0.25
FP-ABM8G-MFG [mm]
  rect 1.4x1.2 smd paste+0 mask+0: 1(-1.1,-0.85) 2(1.1,-0.85) 3(1.1,0.85) 4(-1.1,0.85)
  silkscreen extent -2.47,-1.83 1.6,1.83, body extent -1.9,-1.55 1.9,1.55, height 0.25
FP-B2B-XH-A_LF_SN-MFG [mm]
  rect 1.55x1.55 hole 1 paste-2539.97 mask+0: 1(-1.25,0.525)
  round 1.55 hole 1 paste-2539.97 mask+0: 2(1.25,0.525)
  silkscreen extent -4.5,-2.88 3.7,2.88, body extent -3.8,-2.98 3.8,2.98, height 0.25
FP-B4B-XH-A_LF_SN-MFG [mm]
  rect 1.4x1.4 hole 0.9 paste-2539.97 mask+0: 1(3.75,-0.525)
  round 1.4 hole 0.9 paste-2539.97 mask+0: 2(1.25,-0.525) 3(-1.25,-0.525) 4(-3.75,-0.525)
  silkscreen extent -6.2,-2.88 6.87,2.88, body extent -6.3,-2.98 6.3,2.98, height 0.25
FP-B8B-XH-A_LF_SN-MFG [mm]
  rect 1.4x1.4 hole 0.9 paste-2539.97 mask+0: 1(8.75,-0.525)
  round 1.4 hole 0.9 paste-2539.97 mask+0: 2(6.25,-0.525) 3(3.75,-0.525) 4(1.25,-0.525) 5(-1.25,-0.525) 6(-3.75,-0.525) 7(-6.25,-0.525) 8(-8.75,-0.525)
  silkscreen extent -11.2,-2.88 11.92,2.88, body extent -11.3,-2.98 11.3,2.98, height 0.25
FP-C04-065-SL-IPC_C [mm]
  rect 1.874x0.542 smd paste+0 mask+0: 1(-2.316,3.81)
  rrect100% 1.874x0.542 smd paste+0 mask+0: 2(-2.316,2.54) 3(-2.316,1.27) 4(-2.316,0) 5(-2.316,-1.27) 6(-2.316,-2.54) 7(-2.316,-3.81) 8(2.316,-3.81) 9(2.316,-2.54) 10(2.316,-1.27) 11(2.316,0) 12(2.316,1.27) 13(2.316,2.54) 14(2.316,3.81)
  silkscreen extent -3.88,-4.33 0.88,4.33, body extent -3.35,-4.43 3.35,4.43, height 0.25
FP-DQA0010A-MFG [mm]
  rrect50% 0.565x0.2 smd paste+0 mask+0: 1(-0.417,1) 2(-0.417,0.5) 4(-0.417,-0.5) 5(-0.417,-1) 6(0.417,-1) 7(0.417,-0.5) 9(0.417,0.5) 10(0.417,1)
  rrect25% 0.565x0.4 smd paste-1000 mask+0: 3(-0.417,0) 8(0.417,0)
  silkscreen extent -1.37,-1.48 0.55,1.48, body extent -0.8,-1.4 0.8,1.4, height 0.25
FP-GRM21B-0_2-e0_2_0_7-IPC_B [mm]
  rect 1.255x1.456 smd paste+0 mask+0: 1(-0.826,0) 2(0.826,0)
  silkscreen extent -1.45,-1.13 1.45,1.13, body extent -1.7,-0.98 1.7,0.98, height 0.25
FP-GRM188-0_1-e0_2_0_55-IPC_A [mm]
  rect 1.208x1.012 smd paste+0 mask+0: 1(-0.802,0) 2(0.802,0)
  silkscreen extent -1.41,-0.91 1.41,0.91, body extent -1.91,-1.01 1.91,1.01, height 0.25
FP-IHLP-4040DZ-FP_3_124x3-MFG [mm]
  rect 3.124x3.251 smd paste+0 mask+0: 1(-4.47,0) 2(4.47,0)
  silkscreen extent -5.14,-5.14 5.14,5.14, body extent -6.13,-5.24 6.13,5.24, height 0.25
FP-KXT331LHS-MFG [mm]
  rect 0.55x1.5 smd paste+0 mask+0: 1(-1.625,0) 2(1.625,0)
  silkscreen extent -1.65,-1.15 1.65,1.15, body extent -2,-1.25 2,1.25, height 0.25
FP-LC-8-IPC_A [mm]
  rect 2.474x0.622 smd paste+0 mask+0: 1(-2.416,1.905)
  rrect100% 2.474x0.622 smd paste+0 mask+0: 2(-2.416,0.635) 3(-2.416,-0.635) 4(-2.416,-1.905) 5(2.416,-1.905) 6(2.416,-0.635) 7(2.416,0.635) 8(2.416,1.905)
  silkscreen extent -4.37,-2.45 0.68,2.45, body extent -4.15,-2.95 4.15,2.95, height 0.25
FP-LC-8-IPC_C [mm]
  rect 1.874x0.542 smd paste+0 mask+0: 1(-2.316,1.905)
  rrect100% 1.874x0.542 smd paste+0 mask+0: 2(-2.316,0.635) 3(-2.316,-0.635) 4(-2.316,-1.905) 5(2.316,-1.905) 6(2.316,-0.635) 7(2.316,0.635) 8(2.316,1.905)
  silkscreen extent -3.98,-2.45 0.88,2.45, body extent -3.35,-2.55 3.35,2.55, height 0.25
FP-LQH32PB_N0-MFG [mm]
  rect 1.25x2 smd paste+0 mask+0: 1(-1.275,0) 2(1.275,0)
  silkscreen extent -1.75,-1.4 1.75,1.4, body extent -2,-1.5 2,1.5, height 0.25
FP-OS-CON-SMT-E12-MFG [mm]
  rect 4.15x1.9 smd paste+0 mask+0: 1(-3.475,0) 2(3.475,0)
  silkscreen extent -6.25,-4.25 4.25,4.25, body extent -5.8,-4.5 5.8,4.5, height 0.25
FP-PFL1609-MFG [mm]
  rect 0.64x1.02 smd paste+0 mask+0: 1(-0.635,0) 2(0.635,0)
  silkscreen extent -0.9,-0.89 0.9,0.89, body extent -1.05,-0.64 1.05,0.64, height 0.25
FP-SMC-MFG [mm]
  rect 2.5x3.3 smd paste+0 mask+0: 1(-3.45,0) 2(3.45,0)
  silkscreen extent -4.25,-3.11 3.55,3.11, body extent -4.8,-3.21 4.8,3.21, height 0.25
FP-SOD-123-IPC_A [mm]
  rect 1.308x0.762 smd paste+0 mask+0: 1(-1.825,0)
  rrect100% 1.308x0.762 smd paste+0 mask+0: 2(1.825,0)
  silkscreen extent -2.39,-0.8 1.35,1.01, body extent -2.98,-1.3 2.98,1.3, height 0.25
FP-SOT89-MFG [mm]
  rect 0.58x1.73 smd paste+0 mask+0: 1(-1.5,-1.635) 3(1.5,-1.635)
  round 1.74 smd paste+0 mask+0: 2(0,0.146)
  Top Layer region: -0.38,-2.5 0.38,-2.5 0.38,-1 0.967,-1 0.967,2.03 -0.967,2.03 -0.967,-1 -0.38,-1 -0.38,-2.5
  silkscreen extent -2.3,-1.3 2.3,1.3, body extent -2.4,-2.6 2.4,2.13, height 0.25
FP-SOT323-3L-MFG [mm]
  rect 0.7x0.42 smd paste+0 mask+0: 1(-1,0.65) 2(-1,-0.65) 3(1,0)
  silkscreen extent -0.67,-1.1 0.67,1.1, body extent -1.45,-1.2 1.45,1.2, height 0.25
FP-SRF4532-MFG [mm]
  round 0.99 smd paste+0 mask+0: 1(-2.05,-1.25) 2(2.05,-1.25)
  round 0.97 smd paste+0 mask+0: 3(2.05,1.125) 4(-2.05,1.125)
  Top Layer region: -2.6,0.45 -2.6,1.8 -1.5,1.8 -1.5,0.95 -1.9,0.45
  Top Layer region: 1.5,1.8 2.6,1.8 2.6,0.45 1.9,0.45 1.5,0.95
  Top Layer region: 1.5,-1.8 1.5,-0.95 1.9,-0.45 2.6,-0.45 2.6,-1.8
  Top Layer region: -2.6,-1.8 -2.6,-0.45 -1.9,-0.45 -1.5,-0.95 -1.5,-1.8
  silkscreen extent -2.17,-2.47 1.12,1.7, body extent -2.7,-1.9 2.7,1.9, height 0.25
FP-TPSE-MFG [mm]
  rect 2x3 smd paste+0 mask+0: 1(-3,0) 2(3,0)
  silkscreen extent -3.75,-2.25 4.9,2.25, body extent -4.1,-2.35 4.1,2.35, height 0.25
FP-TSOT26-MFG [mm]
  rect 1x0.7 smd paste+0 mask+0: 1(-1.099,0.95) 2(-1.099,0) 3(-1.099,-0.95) 4(1.099,-0.95) 5(1.099,0) 6(1.099,0.95)
  silkscreen extent -2.33,-1.5 0.22,1.5, body extent -1.7,-1.6 1.7,1.6, height 0.25
KSTN-3557-2 [mm] "Fuse Holder, PCB Mount, Thru-Hole, Body 19.8x6.8mm, Height 7.4mm"
  round 2.15 hole 1.8: 1(-6.75,1.7) 2(-6.75,-1.7) 3(6.75,1.7) 4(6.75,-1.7)
  silkscreen extent -9.9,-3.4 9.9,4.12, body extent -9.91,-3.37 9.91,3.37, height 7.74
KTW0007B_L [mm] "DPAK, 7-Leads, Body 9.4x10.4mm, Pitch 1.27mm, IPC High Density"
  rrect11% 3.2x0.9 smd: 1(-6.25,3.81) 2(-6.25,2.54) 3(-6.25,1.27) 4(-6.25,0) 5(-6.25,-1.27) 6(-6.25,-2.54) 7(-6.25,-3.81)
  rrect1% 8.5x10.45 smd: 8(3.6,0)
  silkscreen extent -6.37,-5.2 -1.05,5.2, body extent -3.3,-5.2 6.1,5.2, height 4.65
MAX96724FGTN_V+-Footprint-1 [mm]
  oval 0.95x0.25 smd: 1(-3.875,3.25) 2(-3.875,2.75) 3(-3.875,2.25) 4(-3.875,1.75) 5(-3.875,1.25) 6(-3.875,0.75) 7(-3.875,0.25) 8(-3.875,-0.25) 9(-3.875,-0.75) 10(-3.875,-1.25) 11(-3.875,-1.75) 12(-3.875,-2.25) 13(-3.875,-2.75) 14(-3.875,-3.25) 29(3.875,-3.25) 30(3.875,-2.75) 31(3.875,-2.25) 32(3.875,-1.75) 33(3.875,-1.25) 34(3.875,-0.75) 35(3.875,-0.25) 36(3.875,0.25) 37(3.875,0.75) 38(3.875,1.25) 39(3.875,1.75) 40(3.875,2.25) 41(3.875,2.75) 42(3.875,3.25)
  oval 0.25x0.95 smd: 15(-3.25,-3.875) 16(-2.75,-3.875) 17(-2.25,-3.875) 18(-1.75,-3.875) 19(-1.25,-3.875) 20(-0.75,-3.875) 21(-0.25,-3.875) 22(0.25,-3.875) 23(0.75,-3.875) 24(1.25,-3.875) 25(1.75,-3.875) 26(2.25,-3.875) 27(2.75,-3.875) 28(3.25,-3.875) 43(3.25,3.875) 44(2.75,3.875) 45(2.25,3.875) 46(1.75,3.875) 47(1.25,3.875) 48(0.75,3.875) 49(0.25,3.875) 50(-0.25,3.875) 51(-0.75,3.875) 52(-1.25,3.875) 53(-1.75,3.875) 54(-2.25,3.875) 55(-2.75,3.875) 56(-3.25,3.875)
  rect 4.7x4.7 smd: 57(0,0)
  silkscreen extent -4.98,-4.2 4.2,4.2, body extent -4.05,-4.05 4.05,4.05, height 0.8
MTC16_L [mm] "TSOP, 16-Leads, Body 5x4.4mm, Pitch 0.65mm, IPC High Density"
  oval 1.4x0.35 smd: 1(-2.8,2.275) 2(-2.8,1.625) 3(-2.8,0.975) 4(-2.8,0.325) 5(-2.8,-0.325) 6(-2.8,-0.975) 7(-2.8,-1.625) 8(-2.8,-2.275) 9(2.8,-2.275) 10(2.8,-1.625) 11(2.8,-0.975) 12(2.8,-0.325) 13(2.8,0.325) 14(2.8,0.975) 15(2.8,1.625) 16(2.8,2.275)
  silkscreen extent -2.93,-2.55 1.7,3.12, body extent -2.25,-2.55 2.25,2.55, height 1.1
ONSC-SOD-123-2-425-04_V [mm] "SOD, 2-Leads, Body 2.69x1.6mm"
  rect 0.91x1.22 smd: 1(-1.635,0) 2(1.635,0)
  silkscreen extent -1.76,-0.8 0.78,1.28, body extent -1.35,-0.8 1.35,0.8, height 1.35
R0603B [mm] "Chip Resistor, 0603, 2-Leads, Body 1.58x0.85mm, IPC Medium Density"
  rrect25% 0.8x0.95 smd: 1(-0.65,0) 2(0.65,0)
  silkscreen extent -0.2,-0.7 0.2,0.7, body extent -0.82,-0.48 0.82,0.48, height 0.5
RESC1005X40X25ML05T05 [mm] "Chip Resistor, 2-Leads, Body 1.00x0.50mm, IPC Low Density"
  rect 0.65x0.65 smd: 1(-0.5,0) 2(0.5,0)
  body extent -0.53,-0.27 0.53,0.28, height 0.4
SISH615ADN-T1-GE3-Footprint-1 [mm]
  rect 0.35x0.5 smd paste+0 mask+0: 1(-0.937,-1.4) 2(-0.288,-1.4) 3(0.363,-1.4) 4(1.012,-1.4)
  round 0.025 smd mask+0: 5-6-7-8(0.038,0.51)
  Top Layer region: -1.187,-0.63 -1.187,-0.215 -1.568,-0.215 -1.568,0.215 -1.187,0.215 -1.187,1.35 -1.137,1.35 -1.137,1.65 -0.737,1.65 -0.737,1.35 -0.487,1.35 -0.487,1.65 -0.088,1.65 -0.088,1.35 0.163,1.35 0.163,1.65 0.563,1.65 0.563,1.35 0.813,1.35 0.813,1.65 1.212,1.65 1.212,1.35 1.262,1.35 1.262,0.215 1.643,0.215 1.643,-0.215 1.262,-0.215 1.262,-0.63
  silkscreen extent -1.51,-2.37 1.59,-1.01, body extent -1.67,-1.75 1.74,1.75, height 0.25
SOT-223_M [mm] "SOT223, 4-Leads, Body 6.5x3.5mm, Pitch 2.3mm, Lead Span 7mm, IPC Low Density"
  rect 2.7x1 smd: 1(-2.95,2.3) 2(-2.95,0) 3(-2.95,-2.3)
  rect 2.7x3.3 smd: 4(2.95,0)
  silkscreen extent -3.08,-3.35 1.3,3.47, body extent -1.85,-3.35 1.85,3.35, height 1.8
TCAN1146DYYRQ1-Footprint-1 [mil]
  rect 38.5x12 smd paste+0 mask+0: 1(-60.75,59.07) 2(-60.75,39.38) 3(-60.75,19.69) 4(-60.75,0) 5(-60.75,-19.69) 6(-60.75,-39.38) 7(-60.75,-59.07) 8(60.75,-59.07) 9(60.75,-39.38) 10(60.75,-19.69) 11(60.75,0) 12(60.75,19.69) 13(60.75,39.38) 14(60.75,59.07)
  silkscreen extent -47,-90 100,90, body extent -66,-84 66,84, height 43
WE-TPC_1038 [mm] "Power Inductor, SMD, 2-Leads, body 10x10mm"
  rect 4.6x1.8 smd: 1(0,4.5) 2(0,-4.5)
  silkscreen extent -5,-4.5 5,6.02, body extent -5,-5 5,5, height 3.8

## Part data
C1_5V_REG_0 C1_5V_REG_1 C10_5V_REG_0 C10_5V_REG_1 C11 C12 C13 C14 C15 C16 C17 C18 C19 C20 C21 C23 C25 C26 C27 C28 C29 C30 C31 C32 C33 C34 C35 C36 C37 C38 C39 C40 C42 C43 C44 C45 C46 C47 C48 C49 C50 C51 C53 C54 C55 C56 C57 C58: library part CMP-001-00058-1, "LARGE PADS, 0402 CAP, CHANGE COMMENT TO MATCH REAL P/N", Capacitor Type=Ceramic, Case/Package=0402, Max Operating Temperature=85°C, Min Operating Temperature=-55°C, Mounting Technology="Surface Mount", Pins=2, RoHS Compliant=Yes
C2_5V_REG_0 C2_5V_REG_1 C3_5V_REG_0 C3_5V_REG_1 C4_5V_REG_0 C4_5V_REG_1 C5_5V_REG_0 C5_5V_REG_1 C8_5V_REG_0 C8_5V_REG_1 C9_5V_REG_0 C9_5V_REG_1: library part CMP-04424-000178-1, "CAP TANT 68UF 10% 25V 2917", Capacitance=68uF, Case Code (Imperial)=2917, Case Code (Metric)=7343, Dielectric Material=Tantalum, ESR (Equivalent Series Resistance)=125mR, Leakage Current=17uA, Max Operating Temperature=125°C, Min Operating Temperature=-55°C, Package Quantity=1, Ripple Current=460uA, Tolerance=10%, Voltage=25V, Case/Package=2917, Depth=4.3mm, Dissipation Factor=6%, Features="General Purpose", Height=4.1mm, Height - Seated (Max)=0.169inch, Lead Free="Lead Free", Length=7.3mm, Mount="Surface Mount", Number of Pins=2, Packaging="Tape and Reel", Polarity=Polar, Radiation Hardening=No, REACH SVHC="No SVHC", RoHS Compliant=Yes, Series=TPS, Termination=SMD/SMT, Voltage Rating=25V, Voltage Rating (DC)=25V, Width=4.3mm
C6_5V_REG_0 C6_5V_REG_1 C7_5V_REG_0 C7_5V_REG_1: library part CMP-05428-001075-1, "Conductive Polymer Aluminum Solid Capacitors (OS-CON) 180uF ±20% 25V", Capacitance=180uF, Case/Package=Radial, ESR (Equivalent Series Resistance)=16mR, Leakage Current=900uA, Max Operating Temperature=105°C, Min Operating Temperature=-55°C, Package Quantity=400, Ripple Current=4.65A, Tolerance=20%, Voltage=25V, Diameter=8mm, Dissipation Factor=12%, Height=11.9mm, Height - Seated (Max)=0.472inch, Lead Free="Lead Free", Length=11.9mm, Life (Hours)=5000Hour, Mount="Surface Mount", Number of Pins=12, Packaging="Tape and Reel", Polarity=Polar, REACH SVHC="No SVHC", Ripple Current (AC)=4.65A, RoHS Compliant=Yes, Series="OS-CON™, SVPF", Termination=SMD/SMT, Voltage Rating=25V, Voltage Rating (DC)=25V